# Altium PCB 复旦微NB无磁水表PCB拼板.PcbDoc
Units mil, origin at the board's own origin, x right, y up, seen from the top; angles counter-clockwise.
Board outline 3172.05 x 12286.1 mil, 2 copper layers (Top Layer, Bottom Layer); 115 components, 101 nets, 364 pads, 315 vias.
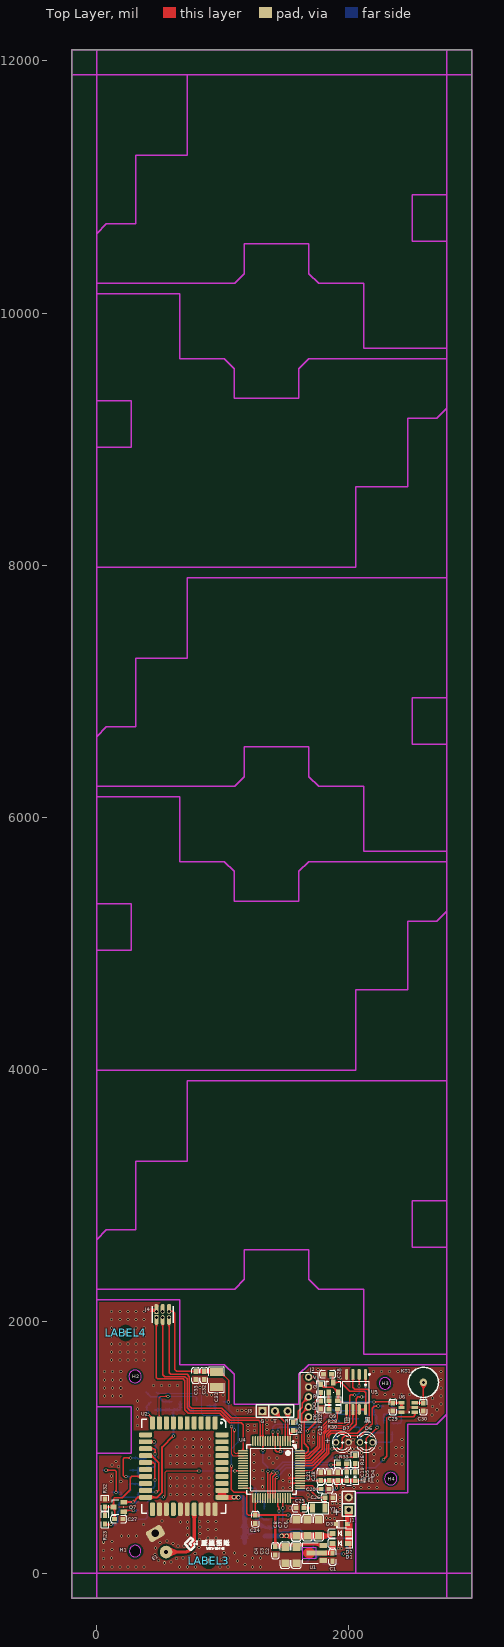
[diagram p0: Top Layer view]
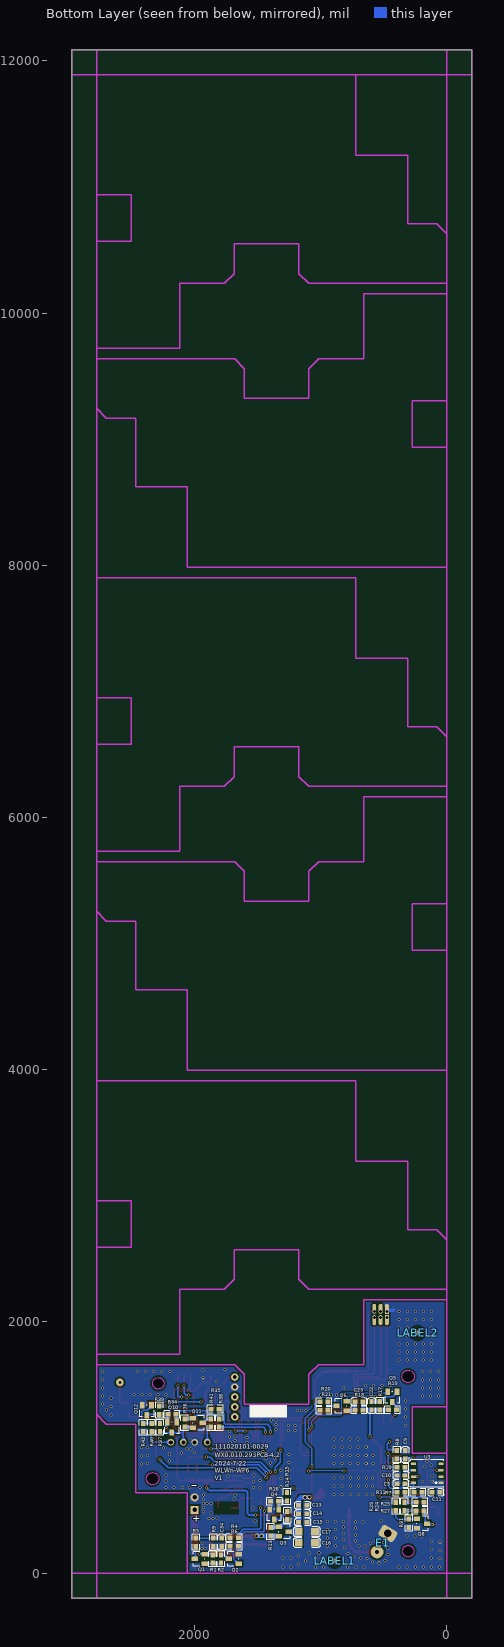
[diagram p1: Bottom Layer view, seen from below]

## Layer stack, top to bottom
Top Solder: solder mask 0.4, Solder Resist, Dk 3.5
Top Layer: signal copper 1.4
Dielectric1: dielectric 12.6, FR-4, Dk 4.8
Bottom Layer: signal copper 1.4
Bottom Solder: solder mask 0.4, Solder Resist, Dk 3.5

## Board outline
-196.85,-196.85 -196.85,12089.25 2975.2,12089.25 2975.2,-196.85
cut-out: -4266.3,-2125 -4256.3,-2125 -4256.3,-2115 -4266.3,-2115
cut-out: 2284.25,751.97 ccw(c2333.46,751.97) 2333.46,702.76 ccw(c2333.46,751.97) 2382.68,751.97 ccw(c2333.46,751.97) 2333.46,801.18 ccw(c2333.46,751.97)
cut-out: 256.69,1562.99 ccw(c305.91,1562.99) 305.91,1513.78 ccw(c305.91,1562.99) 355.12,1562.99 ccw(c305.91,1562.99) 305.91,1612.2 ccw(c305.91,1562.99)
cut-out: 2242.92,1507.88 ccw(c2288.2,1507.88) 2288.2,1462.6 ccw(c2288.2,1507.88) 2333.47,1507.88 ccw(c2288.2,1507.88) 2288.2,1553.16 ccw(c2288.2,1507.88)
cut-out: 2242.92,1507.88 ccw(c2288.2,1507.88) 2288.2,1462.6 ccw(c2288.2,1507.88) 2333.47,1507.88 ccw(c2288.2,1507.88) 2288.2,1553.16 ccw(c2288.2,1507.88)
cut-out: 260.63,177.17 ccw(c305.91,177.17) 305.91,131.89 ccw(c305.91,177.17) 351.18,177.17 ccw(c305.91,177.17) 305.91,222.44 ccw(c305.91,177.17)
cut-out: 256.69,1562.99 ccw(c305.91,1562.99) 305.91,1513.78 ccw(c305.91,1562.99) 355.12,1562.99 ccw(c305.91,1562.99) 305.91,1612.2 ccw(c305.91,1562.99)

## Design rules (kind name [scope] priority, off if disabled: settings)
Clearance [All] p1: gap=10 ignorepadtopadclearanceinfootprint=FALSE except(0: Arc-Hole Track-Hole SMDPad-Hole THPad-Hole Via-Hole Fill-Hole Poly-Hole Region-Hole Text-Hole)
FabricationTestPointUsage TestPointUsage [All] p1: valid=0 allowmultiple=FALSE
FabricationTestpoint Testpoint [All] p1: side=3 testpointundercomponent=TRUE minsize=40 maxsize=100 preferedsize=60 minholesize=0 maxholesize=40 preferedholesize=32 testpointgrid=1 allowsidetop=TRUE allowsidebottom=TRUE usegrid=TRUE gridtolerance=0.01
PolygonConnect [All] p1: connectstyle=Relief reliefconductorwidth=10 reliefentries=4 polygonreliefangle="90 Angle" airgapwidth=10
RoutingVias [All] p1: holewidth=28 width=50 viastyle="Through Hole" minholewidth=28 minwidth=50 maxholewidth=28 maxwidth=50
SolderMaskExpansion [All] p1: expansion=4
Width [All] p1: maxlimit=10 minlimit=10 preferedwidth=10
28 further rules are at their usual default settings.

## Components (designator, comment, footprint, x,y, rotation, side; value= is the part's Value field where it differs from the comment)
C1 "100pF" C0603 1872,96.74 r90 top
C2 "100uF" C1206 1584,79.74 r90 top
C3 "100uF" C1206 1496,79.74 r90 top
C4 "100nF" C0603 1419,147.74 r90 top
C5 "100nF" C0603 395,711.74 r180 bottom
C6 "100uF" C1206 1762,427.74 r270 top
C7 "100uF" C1206 1673,427.74 r270 top
C8 "100uF" C1206 1584,427.74 r270 top
C9 "33pF" C0603 329,973.74 r270 bottom
C10 "33pF" C0603 395,777.24 r180 bottom
C11 "33pF" C0603 118,643.74 r180 bottom
C12 "100nF" C0603 1779,1303.74 r90 top
C13 "22pF" C0603 1110,539.74 r0 bottom
C14 "100pF" C0603 1110,473.74 r0 bottom
C15 "100nF" C0603 1110,407.74 r0 bottom
C16 "100uF" C1206 1045,244.74 r0 bottom
C17 "100uF" C1206 1045,330.74 r0 bottom
C18 "100nF" C0603 1847,801.74 r270 top
C19 "10μF/10V" C0603 1914,801.74 r270 top
C20 "100nF" C0603 1846,669.74 r180 top
C21 "100nF" C0603 1780,801.74 r270 top
C22 "1nF" C0603 597,1362.74 r270 bottom
C23 "1nF" C0603 664,1362.74 r0 bottom
C24 "100nF" C0603 1260,397.74 r90 top
C25 "22pF" C0603 1581,519.74 r0 top
C26 "22pF" C0603 1877,601.74 r180 top
C27 "33pF" C0603 208,431.74 r180 top
C28 "100nF" C0603 1801,1581.74 r0 top
C29 "100nF" C0603 2351,1353.74 r270 top
C30 "4.7pF" C0603 2593,1288.74 r90 top
C31 "47uF" C1210 952,1538 r90 top
C32 "10μF/10V" C0603 853,1538.74 r90 top
C33 "100nF" C0603 786,1538.74 r90 top
C34 "12pF" C0603 1785,214.74 r90 bottom
D1 "DSK14" SOD-123 1997,238.74 r180 top
D2 "DSK14" SOD-123 1997,317.74 r180 top
D3 "XE3D5VB" SOD-323_L1.8-W1.3-LS2.5-RD 1945,391.74 r0 top
D4 "Red" LED-0603 2052,736.74 r90 top
D5 "Green" LED-0603 1985,736.74 r90 top
D6 "AT403" LED-3 2139.63,1040.74 r180 top
D7 "AT203-立" LED-3 1950,1040.74 r0 top locked
E1 "ANTENNA_3" ANT-3 466.91,317.22 r30 bottom locked
H1 "" HOLE-2.5 305.91,177.17 r0 top locked
H2 "" HOLE-2.5 305.91,1562.99 r0 top locked
H3 "" HOLE-2.5 2288.2,1507.88 r0 top locked
H4 "" HOLE-2.5 2333.46,751.97 r0 top locked
J1 "CON2" SIP-2 2000.63,503.74 r90 top
J2 "CON5-2.0" J_DIP_2.0_1*05_H 1682,1557.96 r270 top
J3 "CON3" SIP-3 1316,1287.74 r0 top
J4 "Header 6" PH1.27-2*3 474.99,2029.73 r0 top locked
KT1 "Touch" TOUCH-1 2593.31,1515.75 r0 top
LABEL1 "" MARK 890,100 r90 bottom
LABEL2 "" MARK 231,1908 r90 bottom
LABEL3 "" MARK 890,100 r90 top
LABEL4 "" MARK 231,1908 r90 top
Q1 "CJ2301" SOT-23 1920,77.24 r90 bottom
Q2 "S8050" SOT-23 1649,78.24 r90 bottom
Q3 "CJ2301" SOT-23 1333,368.74 r270 bottom
Q4 "S8050" SOT-23 1331,507.74 r0 bottom
Q5 "S8050" SOT-23 394.5,1440.74 r0 bottom
Q6 "S8050" SOT-23 794,1291.24 r90 bottom
Q7 "S8550" SOT-23 215,489.74 r90 top
Q8 "S8050" SOT-23 236,432.74 r270 bottom
Q9 "S8550" SOT-23 1841,1435.74 r0 top
Q10 "CJ2301" SOT-23 2143,1198.74 r0 bottom
Q11 "CJ2301" SOT-23 2015,1231.74 r270 bottom
Q12 "S8050" SOT-23 2342.5,1334.74 r0 bottom
R1 "1MΩ±5%" R0603 1857,82.74 r90 bottom
R2 "10kΩ±5%" R0603 1791,147.74 r270 bottom
R4 "4.7kΩ±5%" R0603 1653,281.74 r0 bottom
R5 "20K±1%" R0603 1990,214.74 r90 bottom
R6 "47K±5%" R0603 1653,214.74 r0 bottom
R7 "10kΩ±5%" R0603 196,643.74 r0 bottom
R8 "22Ω±5%" R0603 395,908.74 r90 bottom
R9 "10kΩ±1%" R0603 1852,279.74 r270 bottom
R10 "22Ω±5%" R0603 330,841.74 r0 bottom
R11 "22Ω±5%" R0603 330,643.74 r0 bottom
R12 "10kΩ±5%" R0603 1779,1435.74 r90 top
R13 "200KΩ±5%" R0603 1397,363.74 r270 bottom
R14 "10kΩ±5%" R0603 1264,491.74 r270 bottom
R15 "4.7kΩ±5%" R0603 1267,640.74 r270 bottom
R16 "47K±5%" R0603 1400,571.74 r180 bottom
R17 "4.7kΩ±5%" R0603 530,1297.74 r90 bottom
R18 "4.7kΩ±5%" R0603 729,1295.74 r180 bottom
R19 "10kΩ±5%" R0603 398,1297.74 r0 bottom
R20 "10kΩ±5%" R0603 1007,1360.74 r180 bottom
R21 "0Ω±5%" R0603 942,1293.74 r0 bottom
R22 "0Ω±5%" R0603 1561,1132.74 r90 top
R23 "0Ω±5%" R0603 67,393.74 r90 top
R24 "47K±5%" R0603 335,499.74 r90 bottom
R25 "10kΩ±5%" R0603 179,565.74 r0 bottom
R26 "1kΩ±5%" R0603 2052,870.74 r90 top
R27 "4.7kΩ±5%" R0603 179,498.74 r0 bottom
R28 "200KΩ±5%" R0603 1846,1370.74 r0 top
R29 "4.7kΩ±5%" R0603 403,499.74 r90 bottom
R30 "10kΩ±5%" R0603 1911,1303.74 r180 top
R31 "47K±5%" R0603 301,365.74 r90 bottom
R32 "10kΩ±5%" R0603 67,591.74 r270 top
R33 "1kΩ±5%" R0603 1985,870.74 r180 top
R34 "1MΩ±5%" R0603 2148,1261.74 r0 bottom
R35 "1kΩ±5%" R0603 1805,1302.74 r0 bottom
R36 "1MΩ±5%" R0603 2079,1226.74 r270 bottom
R37 "100kΩ±5%" R0603 2275,1190.74 r270 bottom
R38 "1kΩ±5%" R0603 1804,1160.74 r90 bottom
R39 "0Ω±5%" R0603 2280,1262.74 r90 bottom
R40 "20kΩ±5%" R0603 2341.5,1190.74 r270 bottom
R41 "100Ω±5%" R0603 1871,1160.74 r90 bottom
R42 "47K±5%" R0603 2408,1125.74 r90 bottom
U1 "CE6232A33P" SOT89 1699.34,161.74 r90 top
U2 "UMN601-M1" MB26-Y0B 940,1194.46 r270 top
U3 "ESIM" MFF2 45,718.74 r0 bottom
U4 "FM33LE026" LQFP-64_L10.0-W10.0-P0.50-LS12.0-BL 1388.73,824.11 r180 top
U5 "P25Q32H-SUH-IR" SOIC-8 2059,1440.74 r180 top
U6 "TTP233H" SOT-23-6 2525,1279.24 r90 top
Y1 "32.768K" Y3215 1813,519.74 r180 top

## Footprints (in the part's own frame and the unit in brackets; to place one, negate y for a bottom-side part, rotate by r counter-clockwise, add the part's x,y. Pads: shape width x height; smd on the part's side, far side on the other; paste and mask are expansions set on the pad)
ANT-3 [mm]
  round 2.54 hole 0.8: 1(0,4.318)
  rrect50% 3.5x2.5 hole 1.5: 2(0,0)
C0603 [mil]
  rect 40x35 smd: 1(0,0) 2(65,0)
  silkscreen extent -30,-30 95,30
C1206 [mil]
  rect 60x60 smd: 1(0,0) 2(130,0)
  silkscreen extent -40,-40 170,40
C1210 [mm]
  rect 1.635x2.7 smd paste-100 mask+0.051: 1(-1.517,0) 2(1.517,0)
  silkscreen extent -2.56,-1.58 2.56,1.58
HOLE-2.5 [mil]
  round 50 hole 99 unplated: 0(0,0)
J_DIP_2.0_1*05_H [mm]
  round 1.5 hole 0.8: 1(0,0) 2(2,0) 3(4,0) 4(6,0) 5(8,0)
  silkscreen extent -1.02,-1.7 9.02,1.91
LED-3 [mil]
  round 52 hole 31.93: 1(-50,0) 2(50,0)
  silkscreen extent -80,-80 66,80
LED-0603 [mil]
  rect 35x35 smd: 1(0,0) 2(65,0)
  silkscreen extent -30,-30 95,30
LQFP-64_L10.0-W10.0-P0.50-LS12.0-BL [mm]
  oval 0.3x2 smd: 1(-3.75,-5.75) 2(-3.25,-5.75) 3(-2.75,-5.75) 4(-2.25,-5.75) 5(-1.75,-5.75) 6(-1.25,-5.75) 7(-0.75,-5.75) 8(-0.25,-5.75) 9(0.25,-5.75) 10(0.75,-5.75) 11(1.25,-5.75) 12(1.75,-5.75) 13(2.25,-5.75) 14(2.75,-5.75) 15(3.25,-5.75) 16(3.75,-5.75) 33(3.75,5.75) 34(3.25,5.75) 35(2.75,5.75) 36(2.25,5.75) 37(1.75,5.75) 38(1.25,5.75) 39(0.75,5.75) 40(0.25,5.75) 41(-0.25,5.75) 42(-0.75,5.75) 43(-1.25,5.75) 44(-1.75,5.75) 45(-2.25,5.75) 46(-2.75,5.75) 47(-3.25,5.75) 48(-3.75,5.75)
  oval 2x0.3 smd: 17(5.75,-3.75) 18(5.75,-3.25) 19(5.75,-2.75) 20(5.75,-2.25) 21(5.75,-1.75) 22(5.75,-1.25) 23(5.75,-0.75) 24(5.75,-0.25) 25(5.75,0.25) 26(5.75,0.75) 27(5.75,1.25) 28(5.75,1.75) 29(5.75,2.25) 30(5.75,2.75) 31(5.75,3.25) 32(5.75,3.75) 49(-5.75,3.75) 50(-5.75,3.25) 51(-5.75,2.75) 52(-5.75,2.25) 53(-5.75,1.75) 54(-5.75,1.25) 55(-5.75,0.75) 56(-5.75,0.25) 57(-5.75,-0.25) 58(-5.75,-0.75) 59(-5.75,-1.25) 60(-5.75,-1.75) 61(-5.75,-2.25) 62(-5.75,-2.75) 63(-5.75,-3.25) 64(-5.75,-3.75)
  silkscreen extent -5,-5.79 5,5
MARK [mil]
  round 40 smd mask+40: 0(0,0)
  Top Layer pour cut-out: -64,0 -59.13,-24.49 -45.25,-45.25 -24.49,-59.13 0,-64 0,-64 24.49,-59.13 45.25,-45.25 59.13,-24.49 64,0 64,0 59.13,24.49 45.25,45.25 24.49,59.13 0,64 0,64 -24.49,59.13 -45.25,45.25 -59.13,24.49 -64,0
MB26-Y0B [mil]
  rrect50% 105x39 smd: 1(0,0) 2(0,-55.12) 3(0,-110.24) 4(0,-165.35) 5(0,-220.47) 6(0,-275.59) 7(0,-330.71) 8(0,-385.83) 9(0,-440.94) 10(0,-496.06) 21(685.04,-496.06) 22(685.04,-440.94) 23(685.04,-385.83) 24(685.04,-330.71) 25(685.04,-275.59) 26(685.04,-220.47) 27(685.04,-165.35) 28(685.04,-110.24) 29(685.04,-55.12) 30(685.04,0)
  rrect50% 39x105 smd: 11(94.49,-551.18) 12(149.61,-551.18) 13(204.72,-551.18) 14(259.84,-551.18) 15(314.96,-551.18) 16(370.08,-551.18) 17(425.2,-551.18) 18(480.31,-551.18) 19(535.43,-551.18) 20(590.55,-551.18) 31(590.55,55.12) 32(535.43,55.12) 33(480.31,55.12) 34(425.2,55.12) 35(370.08,55.12) 36(314.96,55.12) 37(259.84,55.12) 38(204.72,55.12) 39(149.61,55.12) 40(94.49,55.12)
  silkscreen extent -30,-580 715,85
MFF2 [mil]
  rect 40x20 smd: 1(0,0) 2(0,-50) 3(0,-100) 4(0,-150) 5(220,-150) 6(220,-100) 7(220,-50) 8(220,0)
  silkscreen extent -20,-185 240,35
PH1.27-2*3 [mm]
  rect 0.8x1 hole 0.6: 1(0,1.27) 5(0,0)
  oval 0.8x2 all layers, no hole: 1(0,1.778) 2(2.54,1.778) 3(2.54,-0.508) 4(1.27,-0.508) 5(0,-0.508) 6(1.27,1.778)
  oval 0.8x1 hole 0.6: 2(2.54,1.27) 3(2.54,0) 4(1.27,0) 6(1.27,1.27)
  silkscreen extent -0.82,-1.06 3.36,2.33
R0603 [mil]
  rect 40x35 smd: 1(0,0) 2(65,0)
  silkscreen extent -30,-30 95,30
SIP-2 [mil]
  rect 65x65 hole 35: 1(0,0)
  round 65 hole 35: 2(100,0)
  silkscreen extent -50,-50 150,50
SIP-3 [mil]
  rect 65x65 hole 35: 1(0,0)
  round 65 hole 35: 2(100,0) 3(200,0)
  silkscreen extent -50,-50 250,50
SOD-123 [mil]
  rect 48x40 smd: 1(0,0) 2(125,0)
  silkscreen extent -35,-35 160,35
SOD-323_L1.8-W1.3-LS2.5-RD [mm]
  rect 1x0.75 smd: 1(-1.173,0) 2(1.173,0)
  silkscreen extent -1.08,-0.8 0.9,0.8
SOIC-8 [mm]
  oval 0.63x2.25 smd: 1(-1.905,-3.53) 2(-0.635,-3.53) 3(0.635,-3.53) 4(1.905,-3.53) 5(1.905,3.53) 6(0.635,3.53) 7(-0.635,3.53) 8(-1.905,3.53)
  silkscreen extent -2.82,-3.68 2.64,2.18
SOT89 [mil]
  rect 40x60 smd: 1(-60,-97.98) 2(60,-97.98)
  rect 40x160.63 smd: 3(0,-47.66)
  Top Layer lines w80: 0,20 0,0.49
  Top Layer keep-out region: -45,65 45,65 45,-40 -45,-40
  silkscreen extent -80,-58 80,65
SOT-23 [mil]
  rect 36x50 smd: 1(0,0) 2(75,0) 3(37.5,80)
  silkscreen extent -20,0 95,90
SOT-23-6 [mil]
  rect 25x50 smd: 1(0,0) 2(37.5,0) 3(75,0) 4(75,105) 5(37.5,105) 6(0,105)
  silkscreen extent -3,42 3,48
TOUCH-1 [mil]
  round 60 hole 25: 1(0,0)
  Top Layer pour cut-out: 0,-120 -45.92,-110.87 -84.85,-84.85 -110.87,-45.92 -120,0 -120,0 -110.87,45.92 -84.85,84.85 -45.92,110.87 0,120 0,120 45.92,110.87 84.85,84.85 110.87,45.92 120,0 120,0 110.87,-45.92 84.85,-84.85 45.92,-110.87 0,-120
  silkscreen extent -120,-120 120,120
Y3215 [mil]
  rect 40x72 smd: 1(0,0) 2(100,0)
  silkscreen extent -30,-45 130,45

## Part data
C1 C14: library part 9, "贴片电容,100pF±10%/50V,NP0,国巨"
C2 C3 C6 C7 C8 C16 C17: library part 16, "贴片电容,100uF±20%/6.3V,X5R,村田"
C4 C5 C12 C15 C18 C20 C21 C24 C28 C29 C33: library part 1, "贴片电容,100nF±10%/50V,X7R,国巨"
C9 C10 C11 C27: library part 4, "贴片电容,33pF±10%/50V,NP0,国巨"
C13 C25 C26: library part 3, "贴片电容,22pF±5%/50V,NP0,国巨"
C19 C32: library part 8, "贴片电容,10μF±10%/10V,X7R,村田"
C22 C23: library part 6, "贴片电容,1nF±10%/50V,X7R,国巨"
C30: library part 18, "贴片电容,4.7pF±0.25pF/50V,NPO,国巨"
C31: library part 11, "贴片电容,47uF±10%/16V,NP0,村田"
C34: library part 15, "贴片电容,12pF±5%/50V,NPO,国巨"
D1 D2: library part 8, "DSK14,SOD-123FL,1 A,40 V,28 V,台湾强茂集团苏州群鑫电子,DSK14"
D3: library part 12, "具有3.5pF低结电容，适用于IO线、电源线、高速信号的ESD二极管阵列,SOD-323,5 V,5 V,350 W,5 A,1 uA,矽航,XE3D5VB"
D4: library part 3, "发光二极管,红色,0603,光宝"
D5: library part 5, "发光二极管,绿色,亿光，19-217/GHC-YR1S2/3T"
D6: library part 6, "红外接收头，插件，红光，AT403_PD_01"
D7: library part 5, "红外发射头，插件，红光，AT203"
E1: library part 28, "外置天线焊盘（固定孔）"
H1 H2 H3 H4: library part 22, "定位孔,孔径2.5mm,非金属化,无电气连接"
J1: library part 1, "焊接插座,间距2.54mm"
J2: library part 15, "焊接插座,间距2.0mm"
J3: library part 2, "焊接插座,间距2.54mm"
J4: "Header, 6-Pin"
KT1: library part 2, "按键,6mm弹簧按键,按键直径10mm"
LABEL1 LABEL2 LABEL3 LABEL4: library part 1, "标准Mark点,直径1mm,阻焊开窗3mm"
Q1 Q3 Q10 Q11: library part 2, "贴片MOS管,PMOS,CJ2301,江苏长电"
Q2 Q4 Q5 Q6 Q8 Q12: library part 1, "贴片三极管,NPN,S8050(L),江苏长电"
Q7 Q9: library part 2, "贴片三极管,PNP,S8550(L),江苏长电"
R1 R34 R36: library part 4, "贴片电阻,1MΩ±5%,1/10W,100ppm/℃,国巨"
R2 R7 R12 R14 R19 R20 R25 R30 R32: library part 2, "贴片电阻,10kΩ±5%,1/10W,100ppm/℃,国巨"
R4 R15 R17 R18 R27 R29: library part 12, "贴片电阻,4.7kΩ±5%,1/10W,100ppm/℃,国巨"
R5: library part 23, "贴片电阻，20K,±1%,1/10W,0603,国巨,RC0603FR-0720KL"
R6 R16 R24 R31 R42: library part 22, "贴片电阻，47K,±5%,1/10W,0603,国巨,RC0603JR-0747KL"
R8 R10 R11: library part 14, "贴片电阻,22Ω±5%,1/10W,100ppm/℃,国巨"
R9: library part 6, "贴片电阻,10kΩ±1%,1/10W,100ppm/℃,国巨"
R13 R28: library part 16, "贴片电阻,200kΩ±5%,200mW,100ppm/℃,国巨"
R21 R22 R23 R39: library part 15, "贴片电阻,0Ω±5%,1/10W,100ppm/℃,国巨"
R26 R33 R35 R38: library part 1, "贴片电阻,1kΩ±5%,1/10W,100ppm/℃,国巨"
R37: library part 3, "贴片电阻,100kΩ±5%,1/10W,100ppm/℃,国巨"
R40: library part 7, "贴片电阻,20kΩ±5%,1/10W,100ppm/℃,国巨"
R41: library part 5, "贴片电阻,100Ω±5%,1/10W,100ppm/℃,国巨"
U1: library part 6, "集成电路，CE6232A33P,SOT89"
U2: library part 13, "集成电路,UMN601-M1,九联"
U3: library part 2, "集成电路,ESIM,杭州电信"
U4: library part 10, "单片机,FM33LE026,复旦微"
U5: library part 10, "集成电路，P25Q32H-SUH-IR，SOP-8,普冉半导体（上海）"
U6: library part 5, "集成电路，TTP233H,TONTEK"
Y1: library part 2, "晶振,32.768KHz,±20ppm,12.5pF,3215,EPSON"

## Via types
v1: diameter 24, hole 16, Top Layer to Bottom Layer, tented both sides, 311 vias
v2: diameter 35.43, hole 23.62, Top Layer to Bottom Layer, tented both sides, 4 vias

## Nets (pads, with @x,y where several pads share a name; then routed paths per layer and width w, separated by ;. In a path a pad name is that pad's centre, name@x,y a point inside that pad or via, vN(x,y) a via of type N, cw(c..) or ccw(c..) an arc to the next point about the centre after c; other vN are vias at no path point)
ANT: E1.1 U2.27 | length 526
  Top Layer w25: E1.1 696.82,169.99 ccw(c696.82,238.63) 745.36,190.1 ccw(c674.65,260.81) 774.65,260.81 U2.27
ANT_BLE: 
ANT_NB: 
CTR_F_VCC: R30.1 U4.62 | length 567
  Top Layer w10: U4.62 1676.64,932.38 1754,1009.74 1754,1129.02 1835.72,1210.74 1899,1210.74 1911,1222.74 R30.1
DB_RXD: J3.3 U4.2 | length 237.5
  Top Layer w10: J3.3 1516.68,1287.06 U4.2
DB_TXD: J3.2 U4.3 | length 270.8
  Top Layer w10: J3.2 1416,1278.74 1497,1197.74 U4.3
EXTI0: R39.2 U4.5 U4.7 | length 1288.2
  Top Layer w10: U4.7 1418.26,976.48 1428.63,966.11 1457.63,966.11 U4.5 ; v1(1869,988.74) 1935,988.74 1948,1001.74 1948,1072.74 1968,1092.74 2094,1092.74 2188,1186.74 2188,1310.74 2205,1327.74 v1(2235,1327.74)
  Bottom Layer w10: v1(1458,965.74) 1800,965.74 1823,988.74 v1(1869,988.74)
  Bottom Layer w12: v1(2235,1327.74) R39.2
EXTI1: J4.3 U4.12 U4.39 | length 2109.5
  Top Layer w10: J4.3@574.99,2029.73 574.99,2009.73 574.99,1592.75 588,1579.74 718,1579.74 737,1560.74 737,1325.74 754,1308.74 993,1308.74 1068,1233.74 1301,1233.74 1319.83,1214.91 U4.12 v1(1319.83,973.74) ; v1(1359,808.74) 1359.2,808.54 U4.39
  Bottom Layer w10: v1(1319.83,973.74) 1319.83,882.91 1359,843.74 v1(1359,808.74)
EXTI2: J4.4 U4.13 | length 1667.6
  Top Layer w10: J4.4@524.99,2029.73 524.99,2009.73 524.99,1576.75 540,1561.74 700,1561.74 719,1542.74 719,1314.74 743,1290.74 985.54,1290.74 1062.54,1213.74 1287,1213.74 1300.15,1200.59 U4.13
EXTI3: J4.5 U4.17 | length 1661.9
  Top Layer w10: J4.5@474.99,2029.73 474.99,2009.73 474.99,1553.75 485,1543.74 688,1543.74 701,1530.74 701,1299.74 728,1272.74 978.09,1272.74 1055.09,1195.74 1147,1195.74 1162.36,1180.38 U4.17
FLASH_CLK: U4.59 U5.6 | length 737.5
  Top Layer w10: U4.59 1707.58,873.32 1808,973.74 1808,1106.65 1853.09,1151.74 1992,1151.74 2034,1193.74 U5.6
FLASH_CS: U4.58 U5.1 | length 1118.1
  Top Layer w10: U4.58 1716.9,853.64 1826,962.74 1826,1099.2 1857.54,1130.74 2005,1130.74 2059,1184.74 2059,1386.74 2073,1400.74 v1(2104,1400.74) ; v1(2134,1487.74) U5.1
  Bottom Layer w10: v1(2104,1400.74) 2126,1400.74 2134,1408.74 v1(2134,1487.74)
FLASH_MISO: U4.60 U5.2 | length 1038.2
  Top Layer w10: U4.60 1698.27,893.01 1790,984.74 1790,1114.11 1847.63,1171.74 1980,1171.74 2009,1200.74 2009,1408.74 2017,1416.74 v1(2047,1416.74) ; v1(2084,1487.74) U5.2
  Bottom Layer w10: v1(2047,1416.74) 2070,1416.74 2084,1430.74 v1(2084,1487.74)
FLASH_MOSI: U4.61 U5.5 | length 655.9
  Top Layer w10: U4.61 1682.95,912.69 1772,1001.74 1772,1121.56 1841.18,1190.74 1968,1190.74 1984,1206.74 U5.5
FLASH_VCC: C28.2 Q9.3 U5.7 U5.8 | length 544.9
  Top Layer w10: C28.2 1874,1573.74 1874,1520.24 Q9.3 1937,1515.74 2009,1443.74 2123,1443.74 2134,1432.74 U5.8 U5.7 U5.7@2082,1303.76
FLASH_WP: U4.56 U5.3 | length 1279.8
  Top Layer w10: U4.56 1706.53,814.27 1844,951.74 1844,1091.74 1864,1111.74 2070,1111.74 2163,1204.74 2163,1448.74 2150,1461.74 2048,1461.74 2034,1475.74 U5.3
GND: C1.1 C2.1 C3.1 C4.1 C5.1 C6.1 C7.1 C8.1 C9.1 C10.1 C11.2 C12.1 C13.1 C14.1 C15.1 C16.1 C17.1 C18.1 C19.1 C20.1 C21.1 C24.1 C25.1 C26.1 C27.1 C28.1 C29.2 C30.1 C31.1 C32.1 C33.1 C34.1 D3.1 D7.2 E1.2 J1.2 J2.2 J3.1 J4.1@474.99,2099.73 Q2.2 Q4.2 Q8.2 Q12.2 R6.1 R9.2 R16.1 R31.1 R32.1 R42.1 U1.1 U2.22 U2.23 U2.25 U2.26 U2.28 U2.29 U2.30 U3.1 U4.33 U4.51 U4.53 U5.4 U6.2 U6.6 | length 298.9
  Top Layer w10: 1521,755.74 1521.53,755.21 U4.53 ; 1541,719.74 1544.9,715.84 U4.51
  Top Layer w25: 407,2087.74 463.01,2087.74 J4.1@474.99,2099.73
  Bottom Layer w25: 424,2087.74 463.01,2087.74 J4.1@474.99,2099.73
  other v1: 56.64,52.47 120.91,52.47 185.18,52.47 249.45,52.47 313.73,52.47 378,52.47 657.18,52.19 721.45,52.19 785.73,52.19 978.55,52.19 1042.82,52.19 1235.64,52.19 1299.91,52.19 1176.1,69.8 538,84.74 590,91.74 1119,97 491,102.74 992.8,112.4 634,117.74 54.45,119.01 120,122.74 1043,122.74 1235.82,122.74 1300.09,122.74 685,123.74 738,132.74 1176.6,143.2 464,150.74 783,158.74 1093.5,162.4 1011.8,164.2 54.45,183.29 122,190.74 1919,198.74 1943,198.74 468,203.74 812,206.74 647,218.74 695,218.74 882.91,218.65 947.18,218.65 606,237.74 1937,238.74 503,245.74 54.45,247.56 122,255.01 722,256.74 560,257.74 818,267.74 882.91,282.92 947.18,282.92 252,295.47 316.27,295.47 199,295.74 723,305.74 819,316.74 882.91,347.19 947.18,347.19 723,358.74 819,368.74 372,388.74 723,407.74 666,408.74 882.91,411.47 947.18,411.47 818,413.74 520,414.74 1521,417.74 1854,437.74 1887,437.74 1824,438.74 1869,477.74 1931,490.74 1536,517.74 1931,523.31 1871,554.74 1902,555.74 1931,555.88 1931,588.44 1686.3,591.2 1678.9,620.7 1931,621.01 587.8,628.1 636.64,628.1 700.91,628.1 765.18,628.1 829.45,628.1 893.73,628.1 1480,679.74 1533,680.74 1957,680.74 2042,681.74 2097.91,683.29 2162.18,683.29 2226.45,683.29 1315,687.74 587.8,692.38 636.64,692.38 700.91,692.38 765.18,692.38 829.45,692.38 893.73,692.38 192,727.74 1532,727.74 115,728.74 2227.64,732.56 1480,735.74 1250.73,752.01 1315,752.01 587.8,756.65 636.64,756.65 700.91,756.65 765.18,756.65 829.45,756.65 893.73,756.65 118,771.74 1735,771.74 1529,779.74 2228,779.74 1250.73,816.29 1315,816.29 175,847.74 124,858.74 2422,869.01 2374.27,870.74 585,872.74 638.64,872.92 702.91,872.92 767.18,872.92 831.45,872.92 895.73,872.92 1399,877.74 1250.73,880.56 156,886.74 2199.27,892.56 1367.73,914.74 1432,914.74 2422,933.29 2374.27,935.01 585,935.74 638.64,937.19 702.91,937.19 767.18,937.19 831.45,937.19 895.73,937.19 1250.73,944.83 2200,945.74 2103,953.74 2002,958.74 2030,987.74 2059,987.74 2248,996.74 2422,997.56 2374.27,999.29 638.64,1001.47 702.91,1001.47 767.18,1001.47 831.45,1001.47 895.73,1001.47 1721,1039.74 1585,1040.74 1681,1054.74 2036,1059.74 2422,1061.83 702.91,1065.74 767.18,1065.74 831.45,1065.74 895.73,1065.74 1585,1079.74 1722,1082.74 1681,1091.74 1722,1125.74 1203,1132.74 1254,1132.74 1354,1143.74 326,1175.47 1202,1174.74 1254,1174.74 1354,1181.74 1354,1216.79 1392,1216.74 326,1239.74 2663,1255.74 1117,1291.74 1152,1292.74 1185,1293.74 2701,1298.74 326,1304.01 2664,1325.74 2733,1344.47 326,1368.29 2664,1390.01 63.45,1407.65 127.73,1407.65 192,1407.65 2733,1408.74 874.73,1414.74 1003.27,1414.74 913,1415.74 2226,1421.1 2290.27,1421.1 2354.55,1421.1 2418.82,1421.1 2483.09,1421.1 63.45,1471.92 127.73,1471.92 192,1471.92 2733,1473.01 819,1475.74 451.18,1492.74 515.45,1492.74 579.73,1492.74 644,1492.74 1828,1523.74 63.45,1536.19 127.73,1536.19 192,1536.19 2733,1537.29 1934,1552.74 63.45,1600.47 127.73,1600.47 192,1600.47 2197,1601.38 2261.27,1601.38 2325.55,1601.38 2389.82,1601.38 2454.09,1601.38 2733,1601.56 1934,1612.74 1758,1617.74 120,1692.1 184.27,1692.1 248.55,1692.1 312.82,1692.1 377.09,1692.1 120,1756.38 184.27,1756.38 248.55,1756.38 312.82,1756.38 377.09,1756.38 120,1820.65 184.27,1820.65 248.55,1820.65 312.82,1820.65 377.09,1820.65 120,1884.92 312.82,1884.92 377.09,1884.92 120,1949.19 312.82,1949.19 377.09,1949.19 120,2013.47 184.27,2013.47 248.55,2013.47 312.82,2013.47 377.09,2013.47 120,2077.74 184.27,2077.74 248.55,2077.74 312.82,2077.74 377.09,2077.74
IR_EN: R35.1 U4.8 | length 615.1
  Top Layer w10: U4.8 v1(1398.57,1122.74)
  Bottom Layer w10: v1(1398.57,1122.74) 1398.57,1158.31 1422,1181.74 1754,1181.74 1764,1191.74 1764,1261.74 R35.1
IR_PWM: 
IR_RX: 
IR_TX: R38.1 U4.6 | length 473.7
  Top Layer w10: U4.6 1437.94,1123.68 v1(1438,1123.74)
  Bottom Layer w10: v1(1438,1123.74) 1438,1146.74 1452,1160.74 R38.1 R38.1@1800,1156.74
KEY: U4.42 U6.1 | length 1668.9
  Top Layer w10: U4.42 1418.26,749 v1(1432,762.74) ; v1(2276,902.74) 2304,930.74 2304,1231.74 2317,1244.74 2516,1244.74 2525,1253.74 U6.1
  Bottom Layer w10: v1(1432,762.74) 1507,837.74 2211,837.74 v1(2276,902.74)
LED: 
LED0: R26.2 U4.40 | length 916.2
  Top Layer w10: U4.40 1378.89,784.63 v1(1399,804.74) ; v1(1906,922.74) R26.2@2051,922.74
  Bottom Layer w10: v1(1399,804.74) 1477,882.74 1836,882.74 1876,922.74 v1(1906,922.74)
LED1: R33.2 U4.41 | length 734.1
  Top Layer w10: U4.41 1398.57,767.74 1429.57,798.74 v1(1430,798.74) ; v1(1860,861.74) 1911,861.74 R33.2
  Bottom Layer w10: v1(1430,798.74) 1493,861.74 v1(1860,861.74)
NB_EN: 
NB_ON: R15.1 U4.32 | length 150.3
  Top Layer w10: U4.32 v1(1220,676.47)
  Bottom Layer w10: v1(1220,676.47) 1258.27,676.47 1267,667.74 R15.1 ; R15.1@1264,625.74 R15.1@1264,640.74
NB_RST: C27.2 Q7.3 R23.2 R32.2 U2.17 | length 649.1
  Top Layer w10: R23.2 R32.2 Q7.3@135,526.74 ; C27.2 143,518.74 Q7.3@135,526.74 ; U2.17@355,769.27 279.53,769.27 267,756.74 267,662.74 205,600.74 142,600.74 135,593.74 Q7.3 Q7.3@135,526.74
NB_RST_MCU: R29.2 U4.25 | length 970.5
  Top Layer w8: v1(531,604.74) 545,618.74 545,802.74 556.53,814.27 v1(813.26,814.27) ; v1(1096.53,814.27) U4.25
  Bottom Layer w8: R29.2 443,604.74 v1(531,604.74) ; v1(813.26,814.27) v1(1096.53,814.27)
NB_RX: Q5.3 R19.1 U2.10 | length 199.3
  Top Layer w10: v1@410.12,1261.74 443.94,1227.92 U2.10
  Bottom Layer w10: v1(410,1261.74) 410,1285.74 R19.1 398,1326.74 Q5.3
NB_RX_MCU: R21.2 U4.18 | length 437.4
  Top Layer w8: v1(1093,1136.74) 1093,960.74 1101.68,952.06 U4.18
  Bottom Layer w8: R21.2@1019,1293.74 1094,1218.74 1093,1217.74 v1(1093,1136.74)
NB_TX: Q6.2 U2.9 | length 532.6
  Top Layer w8: U2.9 499.06,1394.8 509,1404.74 v1(565,1404.74)
  Bottom Layer w8: v1(565,1404.74) 785,1404.74 794,1395.74 Q6.2
NB_TX_MCU: Q5.2 U4.19 | length 1147.7
  Top Layer w8: v1(1071,1164.74) 1071,943.74 1082.36,932.38 U4.19
  Bottom Layer w8: Q5.2 480.5,1429.74 826,1429.74 834,1421.74 834,1266.74 846,1254.74 1022,1254.74 1071,1205.74 v1(1071,1164.74)
NetC1_2: C1.2 D1.2 U1.3 | length 202
  Top Layer w35: U1.3 C1.2 D1.2
NetC9_2: C9.2 R8.1 U3.7 | length 379.8
  Top Layer w12: v1(233,768.74) 219,768.74 211,776.74 211,908.74 220,917.74 v1(268,917.74)
  Bottom Layer w12: v1(233,768.74) U3.7 ; v1(268,917.74) 320,917.74 C9.2 R8.1@394,908.74
NetC10_2: C10.2 R10.1 U3.6 | length 129.9
  Bottom Layer w12: U3.6 325.5,818.74 327,820.24 ; C10.2@328,775.24 C10.2 R10.1
NetC11_1: C11.1 R7.1 R11.1 U3.3 | length 563.4
  Top Layer w12: v1(76,818.74) 147,818.74 156,809.74 v1(156,643.74)
  Bottom Layer w10: R7.1 196,609.74 202,603.74 320,603.74 330,613.74 R11.1
  Bottom Layer w12: U3.3 v1(76,818.74) ; C11.1 v1(156,643.74) R7.1
NetC20_2: C20.2 U4.50 | length 176.8
  Top Layer w10: U4.50 1709.58,696.16 1736,669.74 C20.2
NetC22_1: C22.1 Q5.1 R17.2 | length 242.9
  Bottom Layer w8: R17.2 530,1363.74 R17.2@530,1367.74
  Bottom Layer w10: Q5.1 394.5,1436.24 430,1400.74 492,1400.74 R17.2
  Bottom Layer w12: R17.2@530,1363.74 596,1363.74 C22.1
NetC23_2: C23.2 Q6.1 R18.1 | length 133.9
  Bottom Layer w15: C23.2 R18.1 733.5,1291.24 Q6.1
NetC25_2: 
NetC30_2: C30.2 KT1.1 U6.3 | length 230.3
  Top Layer w12: U6.3 2592.5,1354.24 C30.2 2593.31,1354.05 KT1.1
NetC39_1: 
NetD4_2: D4.2 R26.1 | length 69
  Top Layer w10: D4.2 R26.1
NetD5_2: D5.2 R33.1 | length 69
  Top Layer w10: D5.2 R33.1
NetD6_1: D6.1 R40.2 | length 232.5
  Bottom Layer w10: D6.1 2332,1040.74 2344.5,1053.24 R40.2@2344.5,1125.74
NetD6_2: D6.2 Q10.3 Q11.2 R36.2 R37.2 | length 382.6
  Bottom Layer w10: Q11.2 2020,1161.74 R36.2 2089.63,1151.11 2089.63,1116.74 2271,1116.74 R37.2@2280,1125.74 ; D6.2 2089.63,1113.74
NetD7_1: D7.1 R41.1 | length 132
  Bottom Layer w10: R41.1 1900,1131.74 D7.1
NetJ2_3: J2.3 R22.2 | length 252.9
  Top Layer w10: R22.2 1600.5,1237.24 1600.5,1287.24 1632,1318.74 1632,1350.48 J2.3
NetQ1_1: Q1.1 R1.1 R2.2 | length 131.3
  Bottom Layer w8: R2.2 1796.5,77.24 Q1.1
NetQ1_3: Q1.3 R5.1 | length 107.5
  Bottom Layer w10: R5.1@1982,214.74 1994,202.74 1994,120.74 Q1.3
NetQ2_1: Q2.1 R4.2 R6.2 | length 236.5
  Bottom Layer w12: Q2.1 1656.5,78.24 1688,109.74 1688,154.74 1718,184.74 R6.2 R4.2
NetQ2_3: Q2.3 R2.1 | length 75.3
  Bottom Layer w12: Q2.3 1761,147.74 R2.1
NetQ3_1: Q3.1 R13.1 R14.2 | length 159.1
  Bottom Layer w20: R14.2 1322,368.74 Q3.1 1338,363.74 R13.1
NetQ4_1: Q4.1 R15.2 R16.2 | length 135.3
  Bottom Layer w10: R15.2 1271,571.74 R16.2 1331,567.74 Q4.1
NetQ4_3: Q4.3 R14.1 | length 131
  Bottom Layer w10: R14.1 1328,427.74 Q4.3
NetQ6_1: 
NetQ6_3: Q6.3 R20.2 R21.1 | length 135
  Bottom Layer w12: Q6.3 942,1328.74 ; R21.1 942,1328.74 ; R20.2 942,1328.74
NetQ7_1: Q7.1 R24.1 R27.2 | length 180.2
  Top Layer w10: Q7.1@211,493.74 Q7.1 225,499.74 v1(294,499.74)
  Bottom Layer w10: R27.2 245,499.74 v1(294,499.74) R24.1
NetQ8_1: Q8.1 R29.1 R31.2 | length 226.9
  Bottom Layer w10: Q8.1 299,432.74 R31.2 386,430.74 403,447.74 R29.1
NetQ8_3: Q8.3 R23.1 R25.1 R27.1 | length 287.1
  Top Layer w10: R23.1 73,387.74 v1(115,387.74)
  Bottom Layer w10: v1(115,387.74) 152.5,387.74 Q8.3@166,401.24 ; Q8.3 169,408.24 169,488.74 R27.1 R25.1
NetQ9_1: Q9.1 R28.1 R30.2 | length 134.1
  Top Layer w10: Q9.1 1841,1375.74 R28.1 R30.2
NetQ10_1: Q10.1 R34.1 R35.2 | length 360.1
  Bottom Layer w10: R35.2 1880,1292.74 2114,1292.74 2145,1261.74 R34.1 2143,1256.74 Q10.1
NetQ11_1: Q11.1 R36.1 R38.2 | length 309.2
  Bottom Layer w10: R38.2 1804,1229.74 1839,1264.74 1975,1264.74 2008,1231.74 Q11.1 2020,1226.74 R36.1
NetQ11_3: Q11.3 R41.2 | length 77
  Bottom Layer w10: R41.2 1903.5,1225.74 Q11.3
NetQ12_1: Q12.1 R40.1 R42.2 | length 264.9
  Bottom Layer w10: R40.1 R42.2 2419,1201.74 2419,1282.74 2407,1294.74 2376,1294.74 2342.5,1328.24 Q12.1
NetQ12_3: Q12.3 R37.1 R39.1 | length 175.3
  Bottom Layer w10: R37.1@2280,1190.74 R39.1 2372,1262.74 Q12.3
NetR8_2: R8.2 U2.12 | length 243.1
  Top Layer w10: U2.12@355,1044.86 U2.12 v1(453.88,1044.86)
  Bottom Layer w10: R8.2 402,980.74 461,980.74 471,990.74 471,1027.74 v1(453.88,1044.86)
NetR10_2: R10.2 U2.13 | length 312.5
  Top Layer w10: U2.13@355,989.74 U2.13 454,989.74 464,979.74 v1(464,947.74)
  Bottom Layer w10: R10.2 451,841.74 464,854.74 v1(464,947.74)
NetR11_2: R11.2 U2.14 | length 476.6
  Top Layer w10: U2.14@355,934.62 U2.14 436.12,934.62 492,878.74 492,661.74 v1@475,644.74
  Bottom Layer w10: R11.2 396,644.74 v1(470,644.74)
NetR19_2: 
NetR20_2: 
NetR21_2: 
RESET: C12.2 R12.1 R22.1 U4.1 | length 574.1
  Top Layer w8: C12.2 R12.1
  Top Layer w10: U4.1 1536.37,1108.11 R22.1 1563,1130.74 v1(1602,1130.74) ; v1(1672,1131.74) 1735,1194.74 1735,1360.74 1743,1368.74 C12.2
  Bottom Layer w10: v1(1602,1130.74) 1603,1131.74 v1(1672,1131.74)
SVS: C34.2 R5.2 R9.1 U4.45 | length 782
  Top Layer w10: v1(1477.31,517.74) U4.45
  Bottom Layer w10: v1(1477.31,517.74) 1477.31,362.43 1490,349.74 1614,349.74 1643,320.74 1749,320.74 1785,284.74 C34.2 R9.1 ; R9.1@1856,281.74 1858,279.74 R5.2
SVS_EN: R4.1 U4.43 | length 490.6
  Top Layer w10: U4.43 1437.94,533.8 1447,524.74 v1(1447,494.74)
  Bottom Layer w10: v1(1447,494.74) 1447,341.74 1457,331.74 1603,331.74 R4.1
SWCLK: J2.5 U4.63 | length 375.1
  Top Layer w10: U4.63 1663.32,952.06 1680,968.74 1680,998.74 1646,1032.74 1646,1207 J2.5
SWDIO: J2.4 U4.64 | length 372.8
  Top Layer w10: U4.64@1627,971.75 1628,972.75 1628,1267.74 J2.4
USIM_CLK: 
USIM_DATA: 
USIM_RST: 
USIM_VDD: C5.2 R7.2 U2.15 U3.8 | length 584.3
  Top Layer w10: U2.15@355,879.5 U2.15 451.24,879.5 462,868.74 v1(462,739.74)
  Bottom Layer w10: R7.2 265,647.74 U3.8@265,709.74 ; U3.8 U3.8@265,709.74 ; C5.2 C5.2@330,709.74 ; v1(462,739.74) 462,691.74 448,677.74 360,677.74 330,707.74 C5.2@330,709.74 ; U3.8@265,709.74 C5.2@330,709.74
VBAT: D1.1 D2.1 D3.2 J1.1 Q1.2 R1.2 | length 506.2
  Top Layer w12: v1(1961,154.74) 1999,154.74 2011,166.74 2011,224.74 D1.1
  Top Layer w20: D1.1 2000.63,242.37 J1.1
  Bottom Layer w12: R1.2 1864,154.74 v1(1961,154.74)
VCC: C2.2 C3.2 C4.2 C18.2 C19.2 C21.2 C24.2 C29.1 C31.2 C32.2 C33.2 D4.1 D5.1 J2.1 J4.2@574.99,2099.73 Q9.2 Q10.2 R12.2 R20.1 R28.2 R34.2 U1.2 U4.34 U4.52 U4.54 U6.4 U6.5 | length 6167.2
  Top Layer w10: C24.2 1260.78,463.52 U4.34
  Top Layer w12: J4.2@574.99,2079.73 605.01,2079.73 621,2063.74 621,1618.74 636,1603.74 C33.2 ; C31.2 983,1597.74 1047,1533.74 v1(1047,1359.74) ; v1(1070,853.74) 1070,663.74 1090,643.74 1180,643.74 1192.5,631.24 1192.5,474.24 1204,462.74 C24.2 ; C3.2@1496,222.74 C3.2@1504,230.74 ; U4.52 1697,735.53 ; U4.54 1686.84,774.9 1697,764.74 1697,735.53 ; J2.1 1721.78,1557.96 R12.2 1804,1475.74 1876,1475.74 Q9.2 1916,1375.74 R28.2 1920,1361.74 v1(1950,1361.74) ; U1.2@1788.32,230.74 U1.2 ; C18.2 1845.79,735.53 1697,735.53 ; C19.2@1905,727.74 C19.2 ; D4.1 2114,736.74 2138,760.74 2138,1068.74 v1(2227,1157.74) ; v1(2200,1361.74) C29.1@2351,1361.74 ; C29.1 2351.5,1354.24 U6.4 U6.5
  Top Layer w15: C24.2 v1(1518,462.74) ; v1(1905,678.74) C19.2@1905,727.74
  Top Layer w20: C33.2 C32.2 946,1603.74 C31.2 ; C4.2 C4.2@1419,225.74 ; 1419,459.74 C4.2@1419,225.74 ; C3.2@1496,222.74 1493,225.74 C4.2@1419,225.74 ; C3.2@1504,230.74 U1.2@1788.32,230.74 ; C18.2 C19.2 D5.1 D4.1
  Bottom Layer w12: R20.1 v1@1046,1360.74 ; v1(1047,1359.74) 1047,1304.74 1123,1228.74 1123,1042.74 1070,989.74 v1(1070,853.74) ; v1(1950,1361.74) 1951,1360.74 1952,1361.74 v1(2200,1361.74) 2200,1257.74 2204.5,1253.24 R34.2 2218,1256.74 Q10.2 2227,1189.74 v1(2227,1157.74)
  Bottom Layer w15: v1(1518,462.74) 1567.94,462.74 1580.6,475.4 1580.6,642.5 1596.5,658.4 1884.66,658.4 v1(1905,678.74)
VCC_M: C6.2 C7.2 C8.2 D2.2 Q3.2 R13.2 | length 587.9
  Top Layer w35: v2(1469,297.74) v2(1508,297.74) C8.2 C7.2 C6.2 1852,297.74 D2.2
  Bottom Layer w35: Q3.2 1337,297.74 v2(1469,297.74) v2(1508,297.74)
VDCIA: 
VDCID: 
VDD_IO: C22.2 C23.1 Q7.2 R17.1 R18.2 R19.2 R24.2 R25.2 U2.20 | length 1393.1
  Top Layer w15: Q7.2@212,561.74 Q7.2 217,566.74 v1(290,566.74) 327.17,603.91 U2.20 480.17,603.91 520,643.74 520,1001.74 v1(609,1090.74)
  Bottom Layer w8: R18.2@662,1297.74 R18.2
  Bottom Layer w15: R25.2 334,565.74 R24.2 ; R19.2 R17.1 C22.2 C22.2@609,1297.74 ; v1(609,1090.74) C22.2@609,1297.74 ; R18.2@662,1297.74 C22.2@609,1297.74 ; R18.2 C23.1
VDD_IR: 
VDD_NB: C13.2 C14.2 C15.2 C16.2 C17.2 Q3.3 U2.31 U2.32 | length 750.9
  Top Layer w35: U2.31 U2.31@995.12,604.74 ; U2.32 U2.31@995.12,604.74 ; v2(1089,604.74) U2.31@1039.17,604.74 ; v2(1126,603.74) 1038.17,603.74 U2.31@1039.17,604.74 ; U2.31@995.12,604.74 U2.31@1039.17,604.74
  Bottom Layer w35: v2@1089,603.74 v2(1126,603.74) 1157,603.74 1175,585.74 C13.2 C14.2 C15.2 C17.2 ; C16.2 C17.2 ; Q3.3 1175.5,331.24 C17.2
VINTA: 
VSW: 
WF7502_D: 
WF7502_P: 
WF7502_T: 
X32KI: 
X32KO: 
X32MI: 
X32MO: 
XT1: C25.2 U4.48 Y1.2 | length 243.5
  Top Layer w10: U4.48 1627,597.74 1646,578.74 C25.2 Y1.2
XT2: C26.2 U4.49 Y1.1 | length 310.3
  Top Layer w10: U4.49 1679.27,676.47 1754,601.74 C26.2 1812,520.74 Y1.1
pads on no net: H1.0 H2.0 H3.0 H4.0 J4.1@474.99,2079.73 J4.2@574.99,2079.73 J4.6 LABEL1.0 LABEL2.0 LABEL3.0 LABEL4.0 U2.1 U2.2 U2.3 U2.4 U2.5 U2.6 U2.7 U2.8 U2.11 U2.16 U2.18 U2.19 U2.21 U2.24 U2.33 U2.34 U2.35 U2.36 U2.37 U2.38 U2.39 U2.40 U3.2 U3.4 U3.5 U4.4 U4.9 U4.10 U4.11 U4.14 U4.15 U4.16 U4.20 U4.21 U4.22 U4.23 U4.24 U4.26 U4.27 U4.28 U4.29 U4.30 U4.31 U4.35 U4.36 U4.37 U4.38 U4.44 U4.46 U4.47 U4.55 U4.57

## Polygon pours and split planes (outlines as drawn)
GND on Top Layer "Bottom Layer-No Net" (solid, remove dead copper, pour order 24): -245.73,2477.11 2970.33,2477.11 2970.33,-228.71 -245.73,-228.71
GND on Bottom Layer "Bottom Layer-No Net" (solid, remove dead copper, pour order 26): -228.1,2483.95 -228.1,-184.65 2967.21,-184.65 2967.21,2483.95

## Keep-outs
Keep-Out Layer:
  circle w0.79: c305.91,1562.99 r49.21
  circle w0.79: c2333.46,751.97 r49.21
  circle w0.79: c305.91,177.17 r45.28
  circle w0.79: c2288.2,1507.88 r45.28
  circle w0.79: c2288.2,1507.88 r45.28
  circle w0.79: c305.91,177.17 r45.28
  circle w0.79: c2333.46,751.97 r49.21
  circle w0.79: c305.91,1562.99 r49.21
  circle w0.79: c2288.2,1507.88 r45.28
  circle w0.79: c305.91,177.17 r45.28
  circle w0.79: c2333.46,751.97 r49.21
  circle w0.79: c305.91,1562.99 r49.21
  lines w10: -196.85,0 2975.2,0 ; -196.85,11892.4 2975.2,11892.4 ; 0,-196.85 0,12089.25 ; 0,9304.41 274.91,9304.41 274.91,8934.17 0,8934.17 0,8501.1 0,7981.42 2057.87,7981.42 2057.87,8623.15 2467.32,8623.15 2467.32,9166.46 2699.61,9166.46 2778.35,9245.2 2778.35,9638.9 1683.86,9638.9 1605.12,9560.16 1605.12,9323.94 1093.31,9323.94 1093.31,9560.16 1014.57,9638.9 660.24,9638.9 660.24,10154.65 0,10154.65 0,9304.43 ; 2778.35,-196.85 2778.35,12089.25 ; 2778.35,10569.41 2778.35,9719.19 2118.11,9719.19 2118.11,10234.94 1763.78,10234.94 1685.04,10313.68 1685.04,10549.9 1173.23,10549.9 1173.23,10313.68 1094.49,10234.94 0,10234.94 0,10628.64 78.74,10707.38 311.02,10707.38 311.02,11250.69 720.47,11250.69 720.47,11892.42 2778.35,11892.42 2778.35,11372.73 2778.35,10939.66 2503.44,10939.66 2503.44,10569.43 2778.35,10569.43 ; 0,0 0,519.69 ; 0,0 2057.87,0 ; 0,0 0,519.69 ; 0,0 2057.87,0 ; 0,0 0,519.69 ; 0,519.69 0,952.76 ; 0,519.69 0,952.76 ; 0,519.69 0,952.76 ; 0,952.76 274.91,952.76 ; 0,952.76 274.91,952.76 ; 0,952.76 274.91,952.76 ; 0,1322.99 274.91,1322.99 ; 0,1323.01 0,2173.23 ; 0,1323.01 0,2173.23 ; 0,1322.99 274.91,1322.99 ; 0,1323.01 0,2173.23 ; 0,1322.99 274.91,1322.99 ; 0,2173.23 660.24,2173.23 ; 0,2173.23 660.24,2173.23 ; 0,2173.23 660.24,2173.23 ; 274.91,952.76 274.91,1322.99 ; 274.91,952.76 274.91,1322.99 ; 274.91,952.76 274.91,1322.99 ; 660.24,1657.48 1014.57,1657.48 ; 660.24,1657.48 660.24,2173.23 ; 660.24,1657.48 660.24,2173.23 ; 660.24,1657.48 1014.57,1657.48 ; 660.24,1657.48 660.24,2173.23 ; 660.24,1657.48 1014.57,1657.48 ; 1014.57,1657.48 1093.31,1578.74 ; 1014.57,1657.48 1093.31,1578.74 ; 1014.57,1657.48 1093.31,1578.74 ; 1093.31,1342.52 1605.12,1342.52 ; 1093.31,1342.52 1093.31,1578.74 ; 1093.31,1342.52 1093.31,1578.74 ; 1093.31,1342.52 1605.12,1342.52 ; 1093.31,1342.52 1093.31,1578.74 ; 1093.31,1342.52 1605.12,1342.52 ; 1605.12,1342.52 1605.12,1578.74 ; 1605.12,1342.52 1605.12,1578.74 ; 1605.12,1342.52 1605.12,1578.74 ; 1605.12,1578.74 1683.86,1657.48 ; 1605.12,1578.74 1683.86,1657.48 ; 1605.12,1578.74 1683.86,1657.48 ; 1683.86,1657.48 2778.35,1657.48 ; 1683.86,1657.48 2778.35,1657.48 ; 1683.86,1657.48 2778.35,1657.48 ; 2057.87,0 2057.87,641.73 ; 2057.87,0 2057.87,641.73 ; 2057.87,0 2057.87,641.73 ; 2057.87,641.73 2467.32,641.73 ; 2057.87,641.73 2467.32,641.73 ; 2057.87,641.73 2467.32,641.73 ; 2467.32,641.73 2467.32,1185.04 ; 2467.32,641.73 2467.32,1185.04 ; 2467.32,641.73 2467.32,1185.04 ; 2467.32,1185.04 2699.61,1185.04 ; 2467.32,1185.04 2699.61,1185.04 ; 2467.32,1185.04 2699.61,1185.04 ; 2699.61,1185.04 2778.35,1263.78 ; 2699.61,1185.04 2778.35,1263.78 ; 2699.61,1185.04 2778.35,1263.78 ; 2778.35,1263.78 2778.35,1657.48 ; 2778.35,1263.78 2778.35,1657.48 ; 2778.35,1263.78 2778.35,1657.48 ; -196.85,-196.85 2975.2,-196.85 2975.2,12089.25 -196.85,12089.25 -196.85,-196.85 ; 0,2253.52 1094.49,2253.52 1173.23,2332.26 1173.23,2568.48 1685.04,2568.48 1685.04,2332.26 1763.78,2253.52 2118.11,2253.52 2118.11,1737.77 2778.35,1737.77 2778.35,2587.99 2503.44,2588.01 2503.44,2958.24 2778.35,2958.24 2778.35,3391.31 2778.35,3911 720.47,3911 720.47,3269.27 311.02,3269.27 311.02,2725.96 78.74,2725.96 0,2647.22 0,2253.52 ; 0,3990.71 2057.87,3990.71 2057.87,4632.44 2467.32,4632.44 2467.32,5175.75 2699.61,5175.75 2778.35,5254.49 2778.35,5648.19 1683.86,5648.19 1605.12,5569.45 1605.12,5333.23 1093.31,5333.23 1093.31,5569.45 1014.57,5648.19 660.24,5648.19 660.24,6163.94 0,6163.94 0,5313.72 274.91,5313.7 274.91,4943.47 0,4943.47 0,4510.39 0,3990.71 ; 0,6244.23 0,6637.93 78.74,6716.67 311.02,6716.67 311.02,7259.98 720.47,7259.98 720.47,7901.71 2778.35,7901.71 2778.35,7382.02 2778.35,6948.95 2503.44,6948.95 2503.44,6578.72 2778.35,6578.72 2778.35,5728.48 2118.11,5728.48 2118.11,6244.23 1763.78,6244.23 1685.04,6322.97 1685.04,6559.19 1173.23,6559.19 1173.23,6322.97 1094.49,6244.23 0,6244.23

## Other copper
Top Layer:
  region net VBAT: 2029,509.74 2029,219.74 1972,219.74 1972,509.74
  pour cut-out: 286,1134.74 286,949.74 349,949.74 349,1134.74
  pour cut-out: 1733.68,101.45 1744.7,101.45 1745.22,101.45 1746.09,101.61 1746.87,101.9 1748.3,102.44 1749.69,102.95 1750.97,103.68 1751.99,104.35 1752.8,105.16 1753.86,106.09 1754.8,107.16 1755.98,108.51 1757.28,110 1758.34,111.4 1759.4,112.66 1760.96,114.89 1762.25,116.92 1763.3,118.24 1764.48,119.92 1765.69,121.35 1767.05,122.71 1768.26,123.63 1769.53,124.47 1770.73,125.06 1771.79,125.52 1772.76,125.83 1774.2,126.28 1775.51,126.51 1776.94,126.68 1778.93,126.74 1754.8,126.74
Multi-Layer:
  pour cut-out: 1651,570.74 1848,570.74 1848,468.74 1651,468.74

## Silkscreen, mask and mechanical layers (free items; w line width, h text height)
Top Overlay:
  drawing of 475 lines, arcs and shapes, not listed
  text "V" at 1721,1541.74 h30
  text "G" at 1721,1463.74 h30
  text "R" at 1721,1389.74 h30
  text "DO" at 1745,1295.74 h30 r90
  text "CK" at 1749,1212.74 h30 r90
  text "R" at 1498,1193.74 h30
  text "G" at 1304,1192.74 h30
  text "T" at 1405.5,1192.74 h30
  text "黑" at 2122,1181.11 h70
  text "白" at 1960.2,1179.1 h70
  text "+" at 1863,1015.74 h78.74
  text "红" at 2151,705.74 h62.99
  text "绿" at 2093,704.74 h62.99
  text "_" at 2024,691.74 h100
  text "+" at 1939,443.74 h100
Bottom Overlay:
  text "111020101-0029" at 1838.63,979.24 h60
  text "WX0.010.293PCB-4.2" at 1838.63,911.33 h60
  text "2024-7-22" at 1838.69,843.41 h60
  text "WLWn-WP6" at 1838.63,785.74 h60
  text "V1" at 1838.63,726.69 h60
  text "_" at 2024,691.74 h100
  text "+" at 2018,390.74 h100
Mechanical 1:
  circle w0.79: c305.91,1562.99 r49.21
  circle w0.79: c2333.46,751.97 r49.21
  circle w0.79: c305.91,177.17 r45.28
  circle w0.79: c2288.2,1507.88 r45.28
  circle w0.79: c2288.2,1507.88 r45.28
  circle w0.79: c305.91,177.17 r45.28
  circle w0.79: c2333.46,751.97 r49.21
  circle w0.79: c305.91,1562.99 r49.21
Mechanical 4:
  circle w0.02: c2010.63,1519.68 r236.22
  circle w0.02: c2018.5,767.72 r78.74
  lines w0.02: 1861.02,944.88 cw(c1861.02,1043.31) 1861.02,1141.73 ; 2175.98,944.88 ccw(c2175.98,1043.31) 2175.98,1141.73